# Altium PCB Wenzel_REF.PCBDOC (part 3 of 7)
Units mm, origin at the board's own origin, x right, y up, seen from the top; angles counter-clockwise.
Board outline 222.63 x 100.1 mm, 4 copper layers (Top, L2, L3, Bot), stack 1.6 mm thick; 406 components, 236 nets, 1324 pads, 1362 vias.
Unrouted connection lines stored in the file: 1.
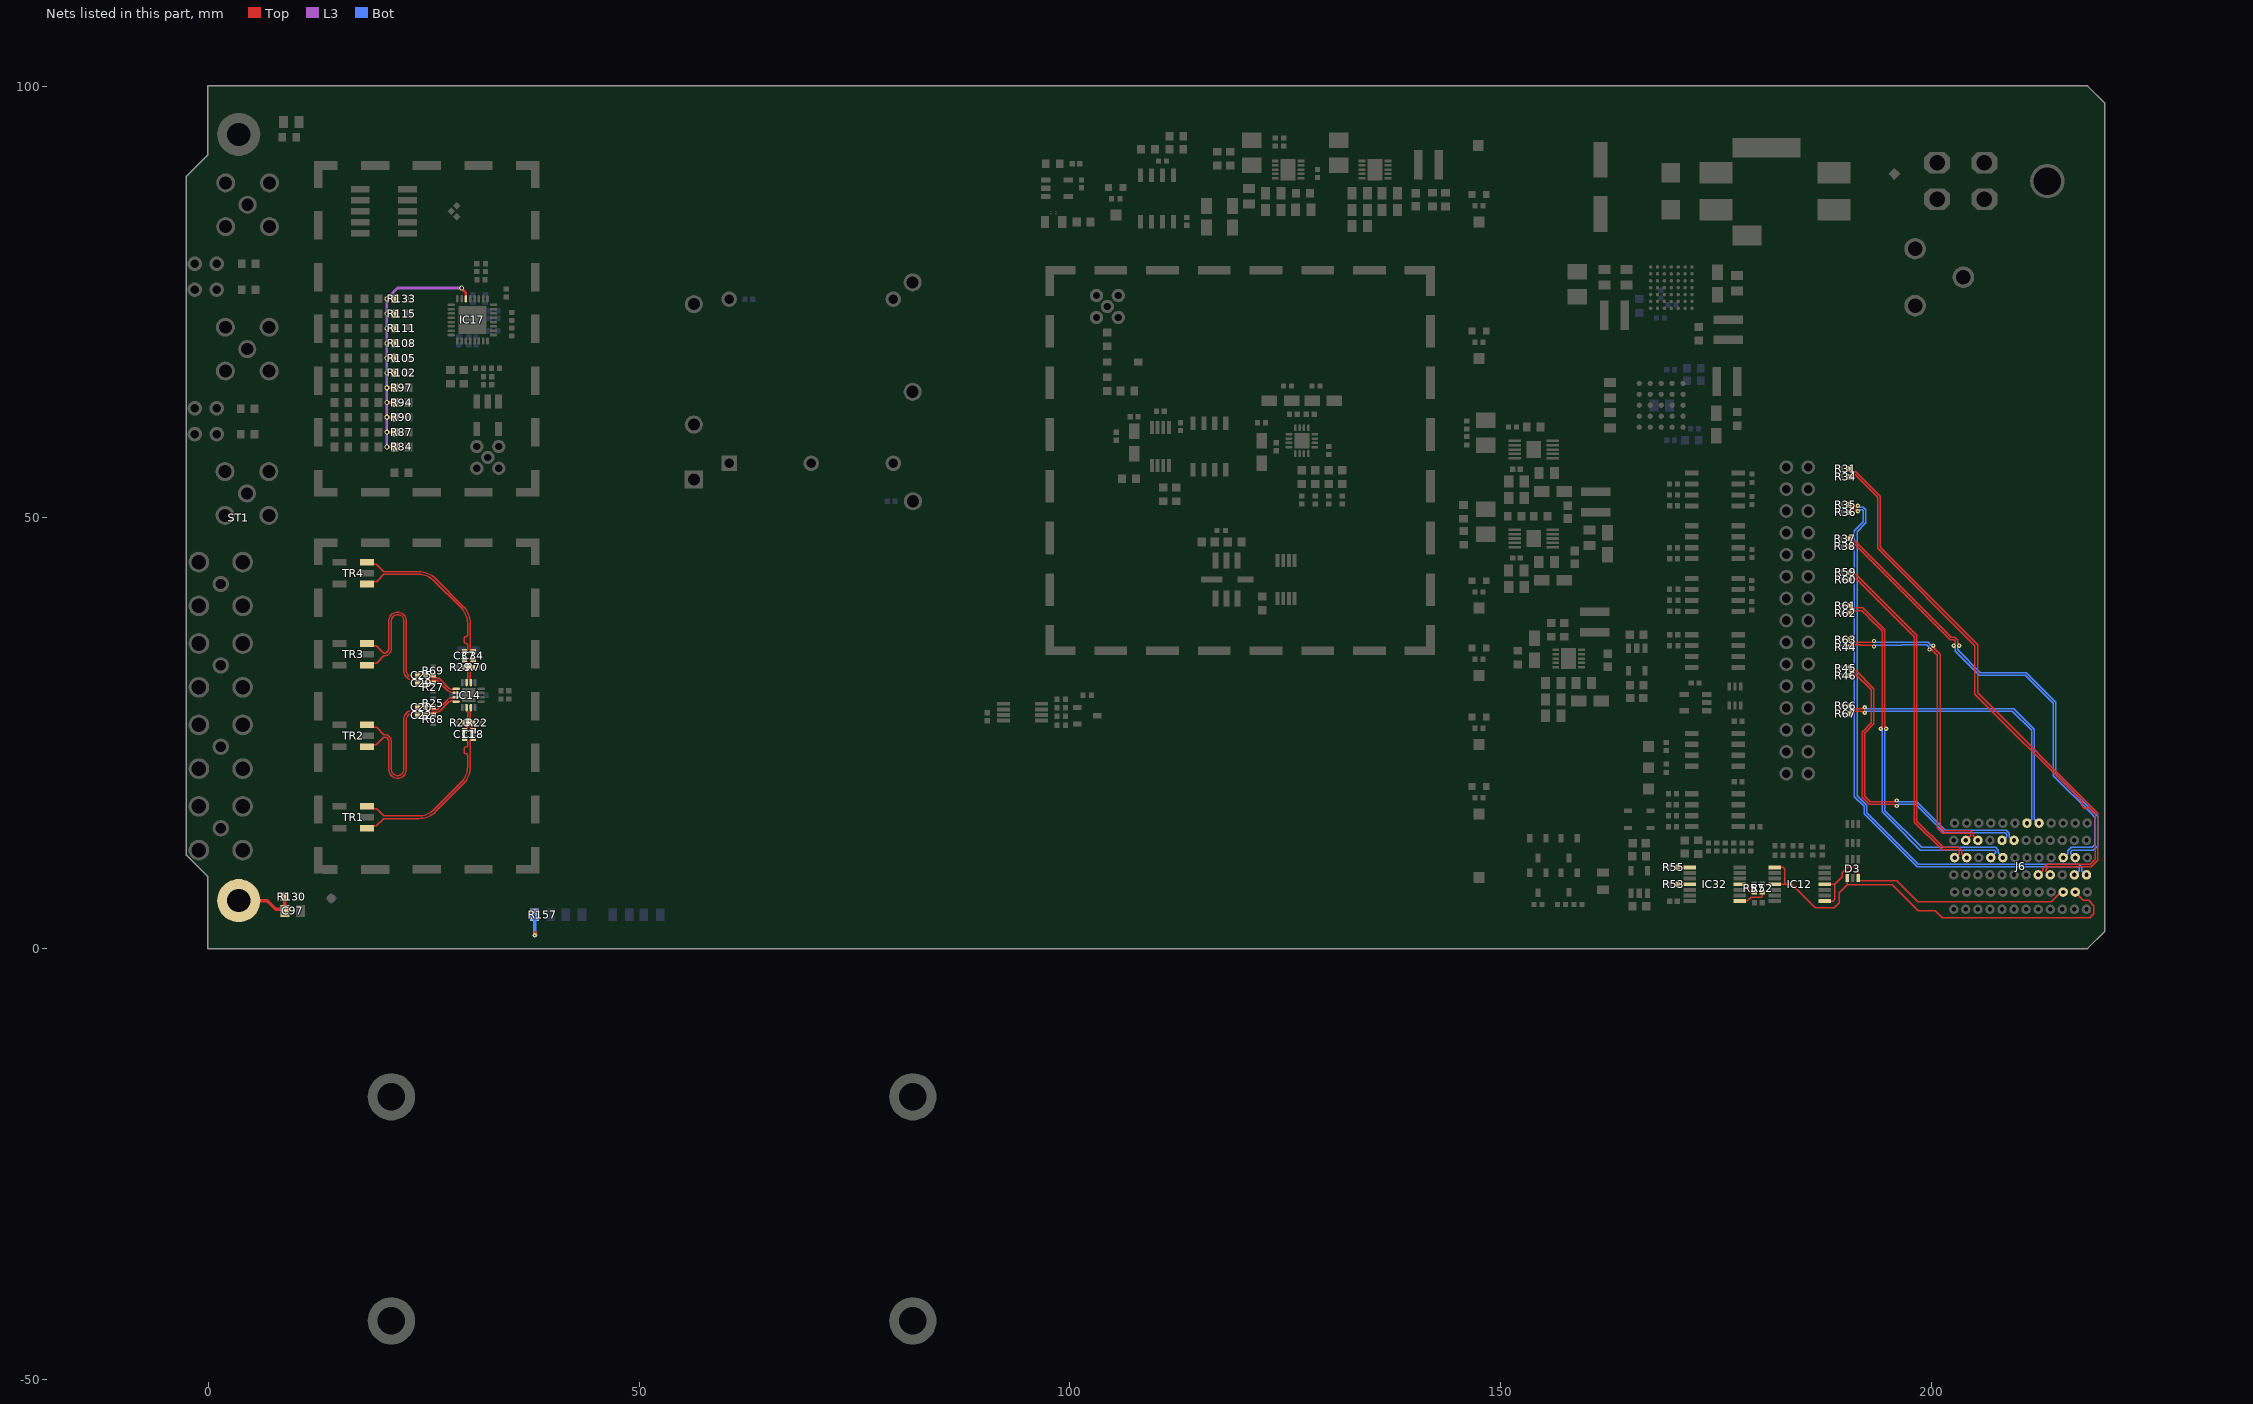
[diagram p4: the nets of this part, all layers, seen from the top]

## Part data (continued)
MSBOX2 MSBOX3: library part MSBOX_LAIRD_BMI-S-205-F, Manufacturer=LAIRD, Manufacturer Part Number=BMI-S-205-F, Author="CERN DEM JLC", Component Type=Standard, ComponentHeight=6mm, CreateDate=21.06.2017, HelpURL=\\cern.ch\dfs\Applications\Altium\Datasheets\MSBOX_LAIRD_BMI-S-205-F.pdf, LatestRevisionDate=21.06.2017, Mounted=Yes, PackageDescription="Frame of Standard Surface Mount Shield (Two Piece), External Dimensions 25.4 x 38.1mm", Part Description="Frame of Standard Surface Mount Shield (Two Piece), External Dimensions 25.4 x 38.1mm", Part Number=MSBOX_LAIRD_BMI-S-205-F, Pin Count=20, PressFit=No, Sense=No, SMD=Yes, Socket=No, Status=None
MSBOXC1: library part MSBOX_LAIRD_BMI-S-207-C, "Metal Screening Box - Top Cover 0 Pin", Manufacturer=LAIRD, Manufacturer Part Number=BMI-S-207-C, Author="CERN DEM JLC", Component Type=Standard, ComponentHeight=2mm, CreateDate=04.07.2017, HelpURL=\\cern.ch\dfs\Applications\Altium\Datasheets\MSBOX_LAIRD_BMI-S-207-C.pdf, LatestRevisionDate=04.07.2017, Mounted=Yes, PackageDescription="Cover for Frame of Standard Surface Mount Shield (Two Piece), External Dimensions 44.83 x 44.83mm", Part Description="Cover for Frame of Standard Surface Mount Shield (Two Piece), External Dimensions 44.83 x 44.83mm", Part Number=MSBOX_LAIRD_BMI-S-207-C, Pin Count=0, PressFit=No, Sense=No, SMD=Yes, Socket=No, Status=None
MSBOXC2 MSBOXC3: library part MSBOX_LAIRD_BMI-S-205-C, "Metal Screening Box - Top Cover 0 Pin", Manufacturer=LAIRD, Manufacturer Part Number=BMI-S-205-C, Author="CERN DEM JLC", Component Type=Standard, ComponentHeight=2mm, CreateDate=21.06.2017, HelpURL=\\cern.ch\dfs\Applications\Altium\Datasheets\MSBOX_LAIRD_BMI-S-205-C.pdf, LatestRevisionDate=21.06.2017, Mounted=Yes, PackageDescription="Cover for Frame of Standard Surface Mount Shield (Two Piece), External Dimensions 25.86 x 38.56mm", Part Description="Cover for Frame of Standard Surface Mount Shield (Two Piece), External Dimensions 25.86 x 38.56mm", Part Number=MSBOX_LAIRD_BMI-S-205-C, Pin Count=0, PressFit=No, Sense=No, SMD=Yes, Socket=No, Status=None
OSC1: library part OSC_100MHZ_PLETRONICS_OLA5007-100.0M, "12V ±0.05ppm Oven Controlled Crystal Oscillator OCXO", Manufacturer=PLETRONICS, Manufacturer Part Number=OLA5007-100.0M, Author="CERN DEM HF", Bonding=No, Component Type=Standard, ComponentHeight=12.7mm, CreateDate=21.12.2023, HelpURL=\\cern.ch\dfs\Applications\Altium\Datasheets\OSC_PLETRONICS_OLA5.pdf, LatestRevisionDate=21.12.2023, Mounted=Yes, PackageDescription="Oscillator, 9.525mm Pitch; 5 Pin, 25.78mm L X 25.78mm W X 12.70mm H, OLA5 Series", Part Description="5V, Stability: ±50ppb, -40°C to +85°C, Ultra Low Phase Noise OCXO, OLA5 Series", Part Number=OSC_100MHZ_PLETRONICS_OLA5007-100.0M, Pin Count=5, PressFit=No, Sense=No, SMD=No, Socket=No
OSC2: library part OSC_WENZEL_501-27514-34, "Surface Mount Voltage Controlled Oscillator, VX-501 Series", Manufacturer=WENZEL, Manufacturer Part Number=501-27514-34, Part Number=OSC_100MHZ_WENZEL_501-27514-34, Author=GK, Bonding=No, Component Type=Standard, ComponentHeight=19.05mm, CreateDate=22.12.2023, HelpURL=\\cern.ch\dfs\Applications\Altium\Datasheets\OSC_WENZEL_501-27514.pdf, LatestRevisionDate=22.12.2023, Mounted=Yes, PackageDescription="Oscillator, 5 Pin, 50.8mm L X 50.8mm W X 19.05mm H, 501 Series", Part Description="12V, Stability: ±0.2ppb, 0°C to +50°C, Low Noise Crystal Oscillators OCXO, OLA5 Series", Pin Count=5, PressFit=No, Sense=No, SMD=No, Socket=No
R1 R4 R65: library part R0402_2K2_1%_0.0625W_100PPM, "Resistor - 1%", Case=0402, Manufacturer=GENERIC, Manufacturer1 ComponentHeight=0.4mm, Manufacturer1 Example="YAGEO PHYCOMP", Manufacturer1 Part Number=232270672202L, Power=0.0625W, Tolerance=±1%, Author="CERN DEM JLC", Component Type=Standard, CreateDate=03.12.2007, HelpURL=\\cern.ch\dfs\Applications\Altium\Datasheets\R0402_Phycomp_RC0402.pdf, LatestRevisionDate=17.10.2012, Manufacturer Part Number=R0402_2K2_1%_0.0625W_100PPM, Mounted=Yes, Part Description="General Purpose Thick Film Chip Resistor", Part Number=R0402_2K2_1%_0.0625W_100PPM, Pin Count=2, PressFit=No, Sense=No, SMD=Yes, Socket=No, Status="Not Recommended", TC=±100ppm/°C
R2 R148 R169: library part R0603_30R_1%_0.1W_100PPM, "Resistor - 1%", Case=0603, Manufacturer=GENERIC, Manufacturer1 ComponentHeight=0.55mm, Manufacturer1 Example="NIC COMPONENT", Manufacturer1 Part Number=NRC06F30R0TRF, Power=0.1W, Tolerance=±1%, Author="CERN DEM JLC", Component Type=Standard, CreateDate=03/12/2007, HelpURL=\\cern.ch\dfs\Applications\Altium\Datasheets\R0603_NIC_NRC.pdf, LatestRevisionDate=13/03/2008, Manufacturer Part Number=R0603_30R_1%_0.1W_100PPM, Mounted=Yes, Part Description="General Purpose Thick Film Chip Resistor", Part Number=R0603_30R_1%_0.1W_100PPM, Pin Count=2, PressFit=No, Sense=No, SMD=Yes, Socket=No, Status=Preferred, TC=±100ppm/°C
R3 R81 R82 R99 R159 R160: library part R0603_10K_1%_0.1W_100PPM, "Resistor - 1%", Case=0603, Manufacturer=GENERIC, Manufacturer1 ComponentHeight=0.55mm, Manufacturer1 Example="NIC COMPONENT", Manufacturer1 Part Number=NRC06F1002TRF, Power=0.1W, Tolerance=±1%, Author="CERN DEM JLC", Component Type=Standard, CreateDate=03.12.2007, HelpURL=\\cern.ch\dfs\Applications\Altium\Datasheets\R0603_NIC_NRC.pdf, LatestRevisionDate=13.03.2008, Manufacturer Part Number=R0603_10K_1%_0.1W_100PPM, Mounted=Yes, Part Description="General Purpose Thick Film Chip Resistor", Part Number=R0603_10K_1%_0.1W_100PPM, Pin Count=2, PressFit=No, Sense=No, SMD=Yes, Socket=No, Status=Preferred, TC=±100ppm/°C
R5 R6: library part R0402_3K9_1%_0.0625W_100PPM, "Resistor - 1%", Case=0402, Manufacturer=GENERIC, Manufacturer1 ComponentHeight=0.4mm, Manufacturer1 Example="YAGEO PHYCOMP", Manufacturer1 Part Number=232270673902L, Power=0.0625W, Tolerance=±1%, Author="CERN DEM JLC", Component Type=Standard, CreateDate=03.12.2007, HelpURL=\\cern.ch\dfs\Applications\Altium\Datasheets\R0402_Phycomp_RC0402.pdf, LatestRevisionDate=17.10.2012, Manufacturer Part Number=R0402_3K9_1%_0.0625W_100PPM, Mounted=Yes, Part Description="General Purpose Thick Film Chip Resistor", Part Number=R0402_3K9_1%_0.0625W_100PPM, Pin Count=2, PressFit=No, Sense=No, SMD=Yes, Socket=No, Status="Not Recommended", TC=±100ppm/°C
R7 R19 R30 R49 R56 R58 R122 R123 R124 R125 R131 R137 R139 R146 R152 R153: library part R0402_10K_1%_0.0625W_100PPM, "Resistor - 1%", Case=0402, Manufacturer=GENERIC, Manufacturer1 ComponentHeight=0.4mm, Manufacturer1 Example="YAGEO PHYCOMP", Manufacturer1 Part Number=232270671003L, Power=0.0625W, Tolerance=±1%, Author="CERN DEM JLC", Component Type=Standard, HelpURL=\\cern.ch\dfs\Applications\Altium\Datasheets\R0402_Phycomp_RC0402.pdf, Manufacturer Part Number=R0402_10K_1%_0.0625W_100PPM, Mounted=Yes, Part Description="General Purpose Thick Film Chip Resistor", Part Number=R0402_10K_1%_0.0625W_100PPM, Pin Count=2, PressFit=No, Sense=No, SMD=Yes, Socket=No, Status="Not Recommended", TC=±100ppm/°C
  R7 R19 R30 R49 R56 R122 R123 R124 R125 R131 R152 R153: CreateDate=03.12.2007, LatestRevisionDate=17.10.2012
  R58 R137 R139 R146: CreateDate=2007-12-03, LatestRevisionDate=2012-10-17
R8: library part R0603_120K_1%_0.1W_100PPM, "Resistor - 1%", Case=0603, Manufacturer=GENERIC, Manufacturer1 ComponentHeight=0.55mm, Manufacturer1 Example="NIC COMPONENT", Manufacturer1 Part Number=NRC06F1203TRF, Power=0.1W, Tolerance=±1%, Author="CERN DEM JLC", Component Type=Standard, CreateDate=03.12.2007, HelpURL=\\cern.ch\dfs\Applications\Altium\Datasheets\R0603_NIC_NRC.pdf, LatestRevisionDate=13.03.2008, Manufacturer Part Number=R0603_120K_1%_0.1W_100PPM, Mounted=Yes, Part Description="General Purpose Thick Film Chip Resistor", Part Number=R0603_120K_1%_0.1W_100PPM, Pin Count=2, PressFit=No, Sense=No, SMD=Yes, Socket=No, Status=Preferred, TC=±100ppm/°C
R9: library part R0603_12K_1%_0.1W_100PPM, "Resistor - 1%", Case=0603, Manufacturer=GENERIC, Manufacturer1 ComponentHeight=0.55mm, Manufacturer1 Example="NIC COMPONENT", Manufacturer1 Part Number=NRC06F1202TRF, Power=0.1W, Tolerance=±1%, Author="CERN DEM JLC", Component Type=Standard, CreateDate=03.12.2007, HelpURL=\\cern.ch\dfs\Applications\Altium\Datasheets\R0603_NIC_NRC.pdf, LatestRevisionDate=13.03.2008, Manufacturer Part Number=R0603_12K_1%_0.1W_100PPM, Mounted=Yes, Part Description="General Purpose Thick Film Chip Resistor", Part Number=R0603_12K_1%_0.1W_100PPM, Pin Count=2, PressFit=No, Sense=No, SMD=Yes, Socket=No, Status=Preferred, TC=±100ppm/°C
R10 R12 R13 R14 R15 R16 R18 R64 R158 R161 R162 R163 R165 R166 R170: library part R0402_100R_1%_0.0625W_100PPM, "Resistor - 1%", Case=0402, Manufacturer=GENERIC, Manufacturer1 ComponentHeight=0.4mm, Manufacturer1 Example="YAGEO PHYCOMP", Manufacturer1 Part Number=232270671001L, Power=0.0625W, Tolerance=±1%, Author="CERN DEM JLC", Component Type=Standard, CreateDate=03.12.2007, HelpURL=\\cern.ch\dfs\Applications\Altium\Datasheets\R0402_Phycomp_RC0402.pdf, LatestRevisionDate=17.10.2012, Manufacturer Part Number=R0402_100R_1%_0.0625W_100PPM, Mounted=Yes, Part Description="General Purpose Thick Film Chip Resistor", Part Number=R0402_100R_1%_0.0625W_100PPM, Pin Count=2, PressFit=No, Sense=No, SMD=Yes, Socket=No, Status="Not Recommended", TC=±100ppm/°C
R11: library part R0402_39K_1%_0.0625W_100PPM, "Resistor - 1%", Case=0402, Manufacturer=GENERIC, Manufacturer1 ComponentHeight=0.4mm, Manufacturer1 Example="YAGEO PHYCOMP", Manufacturer1 Part Number=232270673903, Power=0.0625W, Tolerance=±1%, Author="CERN DEM JLC", Component Type=Standard, CreateDate=03.12.2007, HelpURL=\\cern.ch\dfs\Applications\Altium\Datasheets\R0402_Phycomp_RC0402.pdf, LatestRevisionDate=17.10.2012, Manufacturer Part Number=R0402_39K_1%_0.0625W_100PPM, Mounted=Yes, Part Description="General Purpose Thick Film Chip Resistor", Part Number=R0402_39K_1%_0.0625W_100PPM, Pin Count=2, PressFit=No, Sense=No, SMD=Yes, Socket=No, Status="Not Recommended", TC=±100ppm/°C
R17: library part R0402_1K_1%_0.0625W_100PPM, "Resistor - 1%", Case=0402, Manufacturer=GENERIC, Manufacturer1 ComponentHeight=0.4mm, Manufacturer1 Example="YAGEO PHYCOMP", Manufacturer1 Part Number=232270671002L, Power=0.0625W, Tolerance=±1%, Author="CERN DEM JLC", Component Type=Standard, CreateDate=2007-12-03, HelpURL=\\cern.ch\dfs\Applications\Altium\Datasheets\R0402_Phycomp_RC0402.pdf, LatestRevisionDate=2012-10-17, Manufacturer Part Number=R0402_1K_1%_0.0625W_100PPM, Mounted=Yes, Part Description="General Purpose Thick Film Chip Resistor", Part Number=R0402_1K_1%_0.0625W_100PPM, Pin Count=2, Sense=No, SMD=Yes, Socket=No, Status="Not recommended", TC=±100ppm/°C
R20: library part R0603_6K2_1%_0.1W_100PPM, "Resistor - 1%", Case=0603, Manufacturer=GENERIC, Manufacturer1 ComponentHeight=0.55mm, Manufacturer1 Example="NIC COMPONENT", Manufacturer1 Part Number=NRC06F6201TRF, Power=0.1W, Tolerance=±1%, Author="CERN DEM JLC", Component Type=Standard, CreateDate=03.12.2007, HelpURL=\\cern.ch\dfs\Applications\Altium\Datasheets\R0603_NIC_NRC.pdf, LatestRevisionDate=13.03.2008, Manufacturer Part Number=R0603_6K2_1%_0.1W_100PPM, Mounted=Yes, Part Description="General Purpose Thick Film Chip Resistor", Part Number=R0603_6K2_1%_0.1W_100PPM, Pin Count=2, PressFit=No, Sense=No, SMD=Yes, Socket=No, Status=Preferred, TC=±100ppm/°C
R21: library part R0402_82R_1%_0.0625W_100PPM, "Resistor - 1%", Case=0402, Manufacturer=GENERIC, Manufacturer1 ComponentHeight=0.4mm, Manufacturer1 Example="YAGEO PHYCOMP", Manufacturer1 Part Number=232270678209L, Power=0.0625W, Tolerance=±1%, Author="CERN DEM JLC", Component Type=Standard, CreateDate=03.12.2007, HelpURL=\\cern.ch\dfs\Applications\Altium\Datasheets\R0402_Phycomp_RC0402.pdf, LatestRevisionDate=17.10.2012, Manufacturer Part Number=R0402_82R_1%_0.0625W_100PPM, Mounted=Yes, Part Description="General Purpose Thick Film Chip Resistor", Part Number=R0402_82R_1%_0.0625W_100PPM, Pin Count=2, PressFit=No, Sense=No, SMD=Yes, Socket=No, Status="Not Recommended", TC=±100ppm/°C
R22 R23 R25 R27 R29 R68 R69 R70: library part R0402_120R_1%_0.0625W_100PPM, "Resistor - 1%", Case=0402, Manufacturer=GENERIC, Manufacturer1 ComponentHeight=0.4mm, Manufacturer1 Example="YAGEO PHYCOMP", Manufacturer1 Part Number=232270671201L, Power=0.0625W, Tolerance=±1%, Author="CERN DEM JLC", Component Type=Standard, CreateDate=03.12.2007, HelpURL=\\cern.ch\dfs\Applications\Altium\Datasheets\R0402_Phycomp_RC0402.pdf, LatestRevisionDate=17.10.2012, Manufacturer Part Number=R0402_120R_1%_0.0625W_100PPM, Mounted=Yes, Part Description="General Purpose Thick Film Chip Resistor", Part Number=R0402_120R_1%_0.0625W_100PPM, Pin Count=2, PressFit=No, Sense=No, SMD=Yes, Socket=No, Status="Not Recommended", TC=±100ppm/°C
R24 R28: library part R1206_0R02_1%_0.5W_100PPM, "Resistor - 1%", Case=1206, Manufacturer="TT Electronics", Manufacturer Part Number=LRF1206-R020FI, Power=0.5W, Tolerance=±1%, Author="CERN DEM JLC", Component Type=Standard, ComponentHeight=0.8mm, CreateDate=11.05.2010, HelpURL=\\cern.ch\dfs\Applications\Altium\Datasheets\R1206_WELWYN_LRF.pdf, LatestRevisionDate=03.09.2012, Mounted=Yes, Part Description="Low Value Flat Chip Resistor", Part Number=R1206_0R02_1%_0.5W_100PPM, Pin Count=2, PressFit=No, Sense=No, SMD=Yes, Socket=No, Status=None, TC=±100ppm/°C
R26: library part R0603_1K2_1%_0.1W_100PPM, "Resistor - 1%", Case=0603, Manufacturer=GENERIC, Manufacturer1 ComponentHeight=0.55mm, Manufacturer1 Example="NIC COMPONENT", Manufacturer1 Part Number=NRC06F1201TRF, Power=0.1W, Tolerance=±1%, Author="CERN DEM JLC", Component Type=Standard, CreateDate=03.12.2007, HelpURL=\\cern.ch\dfs\Applications\Altium\Datasheets\R0603_NIC_NRC.pdf, LatestRevisionDate=13.03.2008, Manufacturer Part Number=R0603_1K2_1%_0.1W_100PPM, Mounted=Yes, Part Description="General Purpose Thick Film Chip Resistor", Part Number=R0603_1K2_1%_0.1W_100PPM, Pin Count=2, PressFit=No, Sense=No, SMD=Yes, Socket=No, Status=Preferred, TC=±100ppm/°C
R31 R34 R35 R36 R37 R38 R44 R45 R46 R59 R60 R61 R62 R63 R66 R67 R126 R127 R128 R136 R144 R145 R150 R151 R179: library part R0402_0R_JUMPER, "Resistor", Case=0402, Manufacturer=GENERIC, Manufacturer1 ComponentHeight=0.4mm, Manufacturer1 Example="YAGEO PHYCOMP", Manufacturer1 Part Number=232270591001L, Author="CERN DEM JLC", Component Type=Standard, CreateDate=03.12.2007, HelpURL=\\cern.ch\dfs\Applications\Altium\Datasheets\R0402_Phycomp_RC0402.pdf, LatestRevisionDate=17.10.2012, Manufacturer Part Number=R0402_0R_JUMPER, Mounted=Yes, Part Description="1A (0.05R Max DC Resistance) Zero Ohm Jumper", Part Number=R0402_0R_JUMPER, Pin Count=2, Sense=No, SMD=Yes, Socket=No
  R31 R34 R35 R36 R37 R38 R44 R45 R46 R59 R60 R61 R62 R63 R66 R67 R136 R150 R151: PressFit=No, Status="Not Recommended"
  R126 R127 R128 R144 R145 R179: Status="Not recommended"
R32 R42: library part R0603_1K6_1%_0.1W_100PPM, "Resistor - 1%", Case=0603, Manufacturer=GENERIC, Manufacturer1 ComponentHeight=0.55mm, Manufacturer1 Example="NIC COMPONENT", Manufacturer1 Part Number=NRC06F1601TRF, Power=0.1W, Tolerance=±1%, Author="CERN DEM JLC", Component Type=Standard, CreateDate=03.12.2007, HelpURL=\\cern.ch\dfs\Applications\Altium\Datasheets\R0603_NIC_NRC.pdf, LatestRevisionDate=13.03.2008, Manufacturer Part Number=R0603_1K6_1%_0.1W_100PPM, Mounted=Yes, Part Description="General Purpose Thick Film Chip Resistor", Part Number=R0603_1K6_1%_0.1W_100PPM, Pin Count=2, PressFit=No, Sense=No, SMD=Yes, Socket=No, Status=Preferred, TC=±100ppm/°C
R33: library part R0603_15K_1%_0.1W_100PPM, "Resistor - 1%", Case=0603, Manufacturer=GENERIC, Manufacturer1 ComponentHeight=0.55mm, Manufacturer1 Example="NIC COMPONENT", Manufacturer1 Part Number=NRC06F1502TRF, Power=0.1W, Tolerance=±1%, Author="CERN DEM JMW", Component Type=Standard, CreateDate=17.08.2015, HelpURL=\\cern.ch\dfs\Applications\Altium\Datasheets\R0603_NIC_NRC.pdf, LatestRevisionDate=17.08.2015, Manufacturer Part Number=R0603_15K_1%_0.1W_100PPM, Mounted=Yes, Part Description="General Purpose Thick Film Chip Resistor", Part Number=R0603_15K_1%_0.1W_100PPM, Pin Count=2, PressFit=No, Sense=No, SMD=Yes, Socket=No, Status=Preferred, TC=±100ppm/°C
R39: library part R0603_33k_1%_0.1W_100PPM, "Resistor - 1%", Case=0603, Manufacturer=GENERIC, Manufacturer1 ComponentHeight=0.55mm, Manufacturer1 Example="NIC COMPONENT", Manufacturer1 Part Number=NRC06F3302TRF, Manufacturer Part Number=R0603_33K_1%_0.1W_100PPM, Power=0.1W, Tolerance=±1%, Author="CERN DEM JLC", Component Type=Standard, CreateDate=03.12.2007, HelpURL=\\cern.ch\dfs\Applications\Altium\Datasheets\R0603_NIC_NRC.pdf, LatestRevisionDate=13.03.2008, Mounted=Yes, Part Description="General Purpose Thick Film Chip Resistor", Part Number=R0603_33K_1%_0.1W_100PPM, Pin Count=2, PressFit=No, Sense=No, SMD=Yes, Socket=No, Status=Preferred, TC=±100ppm/°C
R40: library part R0603_100K_1%_0.1W_100PPM, "Resistor - 1%", Case=0603, Manufacturer=GENERIC, Manufacturer1 ComponentHeight=0.55mm, Manufacturer1 Example="NIC COMPONENT", Manufacturer1 Part Number=NRC06F1003TRF, Power=0.1W, Tolerance=±1%, Author="CERN DEM JLC", Component Type=Standard, CreateDate=03.12.2007, HelpURL=\\cern.ch\dfs\Applications\Altium\Datasheets\R0603_NIC_NRC.pdf, LatestRevisionDate=13.03.2008, Manufacturer Part Number=R0603_100K_1%_0.1W_100PPM, Mounted=Yes, Part Description="General Purpose Thick Film Chip Resistor", Part Number=R0603_100K_1%_0.1W_100PPM, Pin Count=2, PressFit=No, Sense=No, SMD=Yes, Socket=No, Status=Preferred, TC=±100ppm/°C
R41: library part R0603_5K1_1%_0.1W_100PPM, "Resistor - 1%", Case=0603, Manufacturer=GENERIC, Manufacturer1 ComponentHeight=0.55mm, Manufacturer1 Example="NIC COMPONENT", Manufacturer1 Part Number=NRC06F5101TRF, Power=0.1W, Tolerance=±1%, Author="CERN DEM JLC", Component Type=Standard, CreateDate=03.12.2007, HelpURL=\\cern.ch\dfs\Applications\Altium\Datasheets\R0603_NIC_NRC.pdf, LatestRevisionDate=13.03.2008, Manufacturer Part Number=R0603_5K1_1%_0.1W_100PPM, Mounted=Yes, Part Description="General Purpose Thick Film Chip Resistor", Part Number=R0603_5K1_1%_0.1W_100PPM, Pin Count=2, PressFit=No, Sense=No, SMD=Yes, Socket=No, Status=Preferred, TC=±100ppm/°C
R43: library part R0603_51K_1%_0.1W_100PPM, "Resistor - 1%", Case=0603, Manufacturer=GENERIC, Manufacturer1 ComponentHeight=0.55mm, Manufacturer1 Example="NIC COMPONENT", Manufacturer1 Part Number=NRC06F5102TRF, Power=0.1W, Tolerance=±1%, Author="CERN DEM JLC", Component Type=Standard, CreateDate=03.12.2007, HelpURL=\\cern.ch\dfs\Applications\Altium\Datasheets\R0603_NIC_NRC.pdf, LatestRevisionDate=13.03.2008, Manufacturer Part Number=R0603_51K_1%_0.1W_100PPM, Mounted=Yes, Part Description="General Purpose Thick Film Chip Resistor", Part Number=R0603_51K_1%_0.1W_100PPM, Pin Count=2, PressFit=No, Sense=No, SMD=Yes, Socket=No, Status=Preferred, TC=±100ppm/°C
R47: library part R0402_1k5_1%_0.0625W_100PPM, "Resistor - 1%", Case=0402, Manufacturer=GENERIC, Manufacturer1 ComponentHeight=0.4mm, Manufacturer1 Example="YAGEO PHYCOMP", Manufacturer1 Part Number=232270671502L, Manufacturer Part Number=R0402_1K5_1%_0.0625W_100PPM, Power=0.0625W, Tolerance=±1%, Author="CERN DEM JLC", Component Type=Standard, CreateDate=03.12.2007, HelpURL=\\cern.ch\dfs\Applications\Altium\Datasheets\R0402_Phycomp_RC0402.pdf, LatestRevisionDate=17.10.2012, Mounted=Yes, Part Description="General Purpose Thick Film Chip Resistor", Part Number=R0402_1K5_1%_0.0625W_100PPM, Pin Count=2, PressFit=No, Sense=No, SMD=Yes, Socket=No, Status="Not Recommended", TC=±100ppm/°C
R48: library part R0402_22K_1%_0.0625W_100PPM, "Resistor - 1%", Case=0402, Manufacturer=GENERIC, Manufacturer1 ComponentHeight=0.4mm, Manufacturer1 Example="YAGEO PHYCOMP", Manufacturer1 Part Number=232270672203L, Power=0.0625W, Tolerance=±1%, Author="CERN DEM JLC", Component Type=Standard, CreateDate=03.12.2007, HelpURL=\\cern.ch\dfs\Applications\Altium\Datasheets\R0402_Phycomp_RC0402.pdf, LatestRevisionDate=17.10.2012, Manufacturer Part Number=R0402_22K_1%_0.0625W_100PPM, Mounted=Yes, Part Description="General Purpose Thick Film Chip Resistor", Part Number=R0402_22K_1%_0.0625W_100PPM, Pin Count=2, PressFit=No, Sense=No, SMD=Yes, Socket=No, Status="Not Recommended", TC=±100ppm/°C
R50 R73 R74 R79 R80: library part R0402_200R_1%_0.0625W_100PPM, "Resistor - 1%", Case=0402, Manufacturer=GENERIC, Manufacturer1 ComponentHeight=0.4mm, Manufacturer1 Example="YAGEO PHYCOMP", Manufacturer1 Part Number=232270672001L, Power=0.0625W, Tolerance=±1%, Author="CERN DEM JLC", Component Type=Standard, HelpURL=\\cern.ch\dfs\Applications\Altium\Datasheets\R0402_Phycomp_RC0402.pdf, Manufacturer Part Number=R0402_200R_1%_0.0625W_100PPM, Mounted=Yes, Part Description="General Purpose Thick Film Chip Resistor", Part Number=R0402_200R_1%_0.0625W_100PPM, Pin Count=2, PressFit=No, Sense=No, SMD=Yes, Socket=No, Status="Not Recommended", TC=±100ppm/°C
  R50: CreateDate=2007-12-03, LatestRevisionDate=2012-10-17
  R73 R74 R79 R80: CreateDate=03.12.2007, LatestRevisionDate=17.10.2012
R51 R116: library part R0603_49K9_0.1%_0.063W_10PPM, "Resistor - 0.1%", Case=0603, Manufacturer=GENERIC, Manufacturer1 ComponentHeight=0.5mm, Manufacturer1 Example="TYCO HOLSWORTHY", Manufacturer1 Part Number=RN73C1J49K9BTDF, Power=0.063W, Tolerance=±0.1%, Author="CERN DEM JLC", Component Type=Standard, CreateDate=03.12.2007, HelpURL=\\cern.ch\dfs\Applications\Altium\Datasheets\R0603_Tyco_RN73.pdf, LatestRevisionDate=13.03.2008, Manufacturer Part Number=R0603_49K9_0.1%_0.063W_10PPM, Mounted=Yes, Part Description="Thin Film Chip Resistor", Part Number=R0603_49K9_0.1%_0.063W_10PPM, Pin Count=2, PressFit=No, Sense=No, SMD=Yes, Socket=No, Status="Not Recommended", TC=±10ppm
R52 R53 R54 R55 R57 R140: library part R0402_22R_1%_0.0625W_100PPM, "Resistor - 1%", Case=0402, Manufacturer=GENERIC, Manufacturer1 ComponentHeight=0.4mm, Manufacturer1 Example="YAGEO PHYCOMP", Manufacturer1 Part Number=232270672209L, Power=0.0625W, Tolerance=±1%, Author="CERN DEM JLC", Component Type=Standard, CreateDate=03.12.2007, HelpURL=\\cern.ch\dfs\Applications\Altium\Datasheets\R0402_Phycomp_RC0402.pdf, LatestRevisionDate=17.10.2012, Manufacturer Part Number=R0402_22R_1%_0.0625W_100PPM, Mounted=Yes, Part Description="General Purpose Thick Film Chip Resistor", Part Number=R0402_22R_1%_0.0625W_100PPM, Pin Count=2, PressFit=No, Sense=No, SMD=Yes, Socket=No, Status="Not Recommended"
  R52 R53 R54 R55 R57: TC=±100ppm/°C
R71: library part R0805_0R05_1%_0.25W_300PPM, "Resistor - 1%", Case=0805, Manufacturer=GENERIC, Manufacturer1 ComponentHeight=0.60mm, Manufacturer1 Example="YAGEO PHYCOMP", Manufacturer1 Part Number="235051117500L or RL0805FR-7W0R05L", Power=0.25W, Tolerance=±1%, Author="CERN DEM MR", Component Type=Standard, CreateDate=31.03.2016, HelpURL=\\cern.ch\dfs\Applications\Altium\Datasheets\R0805_Phycomp_RL0805.pdf, LatestRevisionDate=31.03.2016, Manufacturer Part Number=R0805_0R05_1%_0.25W_300PPM, Mounted=Yes, Part Description="Low Resistance Thick Film Chip Resistor", Part Number=R0805_0R05_1%_0.25W_300PPM, Pin Count=2, PressFit=No, Sense=No, SMD=Yes, Socket=No, Status="Not Recommended", TC=±300ppm/°C
R72 R76 R78 R83 R84 R86 R87 R89 R90 R91 R94 R95 R97 R98 R102 R103 R104 R106 R108 R109 R110 R112 R115 R120 R132 R134 R167 R168: library part R0603_NO-VALUE, "Resistor", Case=0603, Author="CERN DEM JLC", Component Type=Standard, CreateDate=03.12.2007, HelpURL=Undefined, LatestRevisionDate=13.03.2008, Manufacturer=Undefined, Manufacturer1 ComponentHeight=Undefined, Manufacturer1 Example=Undefined, Manufacturer1 Part Number=Undefined, Manufacturer Part Number=R0603_NO-VALUE, Mounted=No, Part Description="Reserved Footprint For a 0603 (1608) Chip Resistor", Part Number=R0603_NO-VALUE, Pin Count=2, PressFit=No, Sense=No, SMD=Yes, Socket=No, Status=None
R75: library part R0402_49R9_1%_0.0625W_100PPM, "Resistor - 1%", Case=0402, Manufacturer=GENERIC, Manufacturer1 ComponentHeight=0.4mm, Manufacturer1 Example="YAGEO PHYCOMP", Manufacturer1 Part Number="232270674999L or RC0402FR-0749R9L", Power=0.0625W, Tolerance=±1%, Author="CERN DEM JLC", Component Type=Standard, CreateDate=24.10.2012, HelpURL=\\cern.ch\dfs\Applications\Altium\Datasheets\R0402_Phycomp_RC0402.pdf, LatestRevisionDate=24.10.2012, Manufacturer Part Number=R0402_49R9_1%_0.0625W_100PPM, Mounted=Yes, Part Description="General Purpose Thick Film Chip Resistor", Part Number=R0402_49R9_1%_0.0625W_100PPM, Pin Count=2, PressFit=No, Sense=No, SMD=Yes, Socket=No, Status="Not Recommended", TC=±100ppm/°C
R77: library part R0402_4K12_1%_0.0625W_100PPM, "Resistor - 1%", Case=0402, Manufacturer=GENERIC, Manufacturer1 ComponentHeight=0.4mm, Manufacturer1 Example="YAGEO PHYCOMP", Manufacturer1 Part Number="232270674122L or RC0402FR-074K12L", Power=0.0625W, Tolerance=±1%, Author="CERN DEM JLC", Component Type=Standard, CreateDate=24.10.2012, HelpURL=\\cern.ch\dfs\Applications\Altium\Datasheets\R0402_Phycomp_RC0402.pdf, LatestRevisionDate=24.10.2012, Manufacturer Part Number=R0402_4K12_1%_0.0625W_100PPM, Mounted=Yes, Part Description="General Purpose Thick Film Chip Resistor", Part Number=R0402_4K12_1%_0.0625W_100PPM, Pin Count=2, PressFit=No, Sense=No, SMD=Yes, Socket=No, Status="Not Recommended", TC=±100ppm/°C
R85 R88 R93 R96 R101 R105 R107 R111 R114 R129 R130 R133: library part R0603_0R_JUMPER, "Resistor", Case=0603, Manufacturer=GENERIC, Manufacturer1 ComponentHeight=0.55mm, Manufacturer1 Example="NIC COMPONENT", Manufacturer1 Part Number=NRC06Z0, Author="CERN DEM JLC", Component Type=Standard, CreateDate=03.12.2007, HelpURL=\\cern.ch\dfs\Applications\Altium\Datasheets\R0603_NIC_NRC.pdf, LatestRevisionDate=13.03.2008, Manufacturer Part Number=R0603_0R_JUMPER, Mounted=Yes, Part Description="1A (0.05R Max DC Resistance) Zero Ohm Jumper", Part Number=R0603_0R_JUMPER, Pin Count=2, PressFit=No, Sense=No, SMD=Yes, Socket=No, Status=Preferred
R92 R118 R119 R121: library part R0603_220R_1%_0.1W_100PPM, "Resistor - 1%", Case=0603, Manufacturer=GENERIC, Manufacturer1 ComponentHeight=0.55mm, Manufacturer1 Example="NIC COMPONENT", Manufacturer1 Part Number=NRC06F2200TRF, Power=0.1W, Tolerance=±1%, Author="CERN DEM JLC", Component Type=Standard, CreateDate=03.12.2007, HelpURL=\\cern.ch\dfs\Applications\Altium\Datasheets\R0603_NIC_NRC.pdf, LatestRevisionDate=13.03.2008, Manufacturer Part Number=R0603_220R_1%_0.1W_100PPM, Mounted=Yes, Part Description="General Purpose Thick Film Chip Resistor", Part Number=R0603_220R_1%_0.1W_100PPM, Pin Count=2, Sense=No, SMD=Yes, Socket=No, Status=Preferred, TC=±100ppm/°C
R100: library part R0603_3K3_1%_0.1W_100PPM, "Resistor - 1%", Case=0603, Manufacturer=GENERIC, Manufacturer1 ComponentHeight=0.55mm, Manufacturer1 Example="NIC COMPONENT", Manufacturer1 Part Number=NRC06F3301TRF, Power=0.1W, Tolerance=±1%, Author="CERN DEM JLC", Component Type=Standard, CreateDate=03.12.2007, HelpURL=\\cern.ch\dfs\Applications\Altium\Datasheets\R0603_NIC_NRC.pdf, LatestRevisionDate=13.03.2008, Manufacturer Part Number=R0603_3K3_1%_0.1W_100PPM, Mounted=Yes, Part Description="General Purpose Thick Film Chip Resistor", Part Number=R0603_3K3_1%_0.1W_100PPM, Pin Count=2, PressFit=No, Sense=No, SMD=Yes, Socket=No, Status=Preferred, TC=±100ppm/°C
R113: library part R0402_220K_1%_0.0625W_100PPM, "Resistor - 1%", Case=0402, Manufacturer=GENERIC, Manufacturer1 ComponentHeight=0.4mm, Manufacturer1 Example="YAGEO PHYCOMP", Manufacturer1 Part Number=232270672204L, Power=0.0625W, Tolerance=±1%, Author="CERN DEM JLC", Component Type=Standard, CreateDate=03.12.2007, HelpURL=\\cern.ch\dfs\Applications\Altium\Datasheets\R0402_Phycomp_RC0402.pdf, LatestRevisionDate=17.10.2012, Manufacturer Part Number=R0402_220K_1%_0.0625W_100PPM, Mounted=Yes, Part Description="General Purpose Thick Film Chip Resistor", Part Number=R0402_220K_1%_0.0625W_100PPM, Pin Count=2, PressFit=No, Sense=No, SMD=Yes, Socket=No, Status="Not Recommended", TC=±100ppm/°C
R117 R142: library part R0402_27K_1%_0.0625W_100PPM, "Resistor - 1%", Case=0402, Manufacturer=GENERIC, Manufacturer1 ComponentHeight=0.4mm, Manufacturer1 Example="YAGEO PHYCOMP", Manufacturer1 Part Number=232270672703L, Power=0.0625W, Tolerance=±1%, Author="CERN DEM JLC", Component Type=Standard, CreateDate=03/12/2007, HelpURL=\\cern.ch\dfs\Applications\Altium\Datasheets\R0402_Phycomp_RC0402.pdf, LatestRevisionDate=17/10/2012, Manufacturer Part Number=R0402_27K_1%_0.0625W_100PPM, Mounted=Yes, Part Description="General Purpose Thick Film Chip Resistor", Part Number=R0402_27K_1%_0.0625W_100PPM, Pin Count=2, PressFit=No, Sense=No, SMD=Yes, Socket=No, Status="Not Recommended", TC=±100ppm/°C
R135: library part R0402_47K_1%_0.0625W_100PPM, "Resistor - 1%", Case=0402, Manufacturer=GENERIC, Manufacturer1 ComponentHeight=0.4mm, Manufacturer1 Example="YAGEO PHYCOMP", Manufacturer1 Part Number=232270675103L, Power=0.0625W, Tolerance=±1%, Author="CERN DEM JLC", Component Type=Standard, CreateDate=03/12/2007, HelpURL=\\cern.ch\dfs\Applications\Altium\Datasheets\R0402_Phycomp_RC0402.pdf, LatestRevisionDate=17/10/2012, Manufacturer Part Number=R0402_47K_1%_0.0625W_100PPM, Mounted=Yes, Part Description="General Purpose Thick Film Chip Resistor", Part Number=R0402_47K_1%_0.0625W_100PPM, Pin Count=2, PressFit=No, Sense=No, SMD=Yes, Socket=No, Status="Not Recommended", TC=±100ppm/°C
R138: library part R0603_2K7_1%_0.1W_100PPM, "Resistor - 1%", Case=0603, Manufacturer=GENERIC, Manufacturer1 ComponentHeight=0.55mm, Manufacturer1 Example="YAGEO PHYCOMP", Manufacturer1 Part Number=RC0603FR-072K7L, Power=0.1W, Tolerance=±1%, Author="CERN DEM JLC", Component Type=Standard, CreateDate=2011-05-02, HelpURL=\\cern.ch\dfs\Applications\Altium\Datasheets\R0603_PHYCOMP_RC0603.pdf, LatestRevisionDate=2011-05-02, Manufacturer Part Number=R0603_2K7_1%_0.1W_100PPM, Mounted=Yes, Part Description="General Purpose Thick Film Chip Resistor", Part Number=R0603_2K7_1%_0.1W_100PPM, Pin Count=2, PressFit=No, Sense=No, SMD=Yes, Socket=No, Status=Preferred, TC=±100ppm/°C
R141 R143 R147: library part R0402_1k_1%_0.0625W_100PPM, "Resistor - 1%", Case=0402, Manufacturer=GENERIC, Manufacturer1 ComponentHeight=0.4mm, Manufacturer1 Example="YAGEO PHYCOMP", Manufacturer1 Part Number=232270671002L, Manufacturer Part Number=R0402_1K_1%_0.0625W_100PPM, Power=0.0625W, Tolerance=±1%, Author="CERN DEM JLC", Component Type=Standard, CreateDate=03.12.2007, HelpURL=\\cern.ch\dfs\Applications\Altium\Datasheets\R0402_Phycomp_RC0402.pdf, LatestRevisionDate=17.10.2012, Mounted=Yes, Part Description="General Purpose Thick Film Chip Resistor", Part Number=R0402_1K_1%_0.0625W_100PPM, Pin Count=2, PressFit=No, Sense=No, SMD=Yes, Socket=No, Status="Not Recommended"
R149: library part R0805_0R_JUMPER, "Resistor", Case=0805, Manufacturer=GENERIC, Manufacturer1 ComponentHeight=0.6mm, Manufacturer1 Example="NIC COMPONENT", Manufacturer1 Part Number=NRC10Z0, Author="CERN DEM JLC", Component Type=Standard, CreateDate=03.12.2007, HelpURL=\\cern.ch\dfs\Applications\Altium\Datasheets\R0805_NIC_NRC.pdf, LatestRevisionDate=13.03.2008, Manufacturer Part Number=R0805_0R_JUMPER, Mounted=Yes, Part Description="2A (0.05R Max DC Resistance) Zero Ohm Jumper", Part Number=R0805_0R_JUMPER, Pin Count=2, PressFit=No, Sense=No, SMD=Yes, Socket=No, Status=Preferred
R154 R155 R156 R157: library part "R0805_4M7_1%_0.125W_100PPM_VISHAY_CRCW e3", "Resistor - 1%", Case=0805, Manufacturer=VISHAY, Manufacturer Part Number=CRCW08054M70FKEA, Power=0.125W, Tolerance=±1%, Author="CERN DEM BR", Component Type=Standard, ComponentHeight=0.5mm, CreateDate=27/05/2019, HelpURL="\\cern.ch\dfs\Applications\Altium\Datasheets\R0805_VISHAY_CRCW e3.pdf", LatestRevisionDate=27/05/2019, Mounted=Yes, Part Description="150V, Standard Thick Film Chip Resistor", Part Number="R0805_4M7_1%_0.125W_100PPM_VISHAY_CRCW e3", Pin Count=2, PressFit=No, Sense=No, SMD=Yes, Socket=No, Status=None, TC=±100ppm/°C
R164: library part R0402_10R_1%_0.0625W_200PPM, "Resistor - 1%", Case=0402, Manufacturer=GENERIC, Manufacturer1 ComponentHeight=0.4mm, Manufacturer1 Example="YAGEO PHYCOMP", Manufacturer1 Part Number=232270671009L, Power=0.0625W, Tolerance=±1%, Author="CERN DEM JLC", Component Type=Standard, CreateDate=24.06.2009, HelpURL=\\cern.ch\dfs\Applications\Altium\Datasheets\R0402_Phycomp_RC0402.pdf, LatestRevisionDate=17.10.2012, Manufacturer Part Number=R0402_10R_1%_0.0625W_200PPM, Mounted=Yes, Part Description="General Purpose Thick Film Chip Resistor", Part Number=R0402_10R_1%_0.0625W_200PPM, Pin Count=2, PressFit=No, Sense=No, SMD=Yes, Socket=No, Status="Not Recommended", TC=±200ppm/°C
RN5: library part RN_10K_5K_VISHAY_AORN2-1AT3, "DIL8 Resistor Network 4 Resistors 10k-5k-5k-10k 0.1%", Case=SOIC8, Manufacturer="VISHAY DALE", Manufacturer Part Number=AORN2-1AT3, Power=4x0.1W, Tolerance=0.1%, Author="CERN DEM JLC", Component Type=Standard, ComponentHeight=1.73mm, CreateDate=20.02.2017, HelpURL=\\cern.ch\dfs\Applications\Altium\Datasheets\RN_VISHAY_AORN.pdf, LatestRevisionDate=20.02.2017, Mounted=Yes, Part Description="Dual-In-Line Thin Film Precision Automotive Resistors Network, (4 Isolated) - AORN Series", Part Number=RN_10K_5K_VISHAY_AORN2-1AT3, Pin Count=8, PressFit=No, Sense=No, SMD=Yes, Socket=No, TC=±25ppm/°C
ST1: "Schroff 3HP 4U EUROCARD Panel Kit", Manufacturer=Schroff, Manufacturer Part Number=20818-017, Manufacturer Part Number 2=20848-664
T1 T2 T3 T4 T13: "N-CHANNEL MOSFET WITH DIODE", Case=SOT23-3, Manufacturer=NEXPERIA, Author="CERN DEM JLC", Bonding=No, Component Type=Standard, ComponentHeight=1.1mm, CreateDate=16.03.2010, Device=BSH103, HelpURL=\\cern.ch\dfs\Applications\Altium\Datasheets\BSH103.pdf, LatestRevisionDate=20.06.2017, Manufacturer Part Number=BSH103, Mounted=Yes, PackageDescription="SOT23, 0.95mm Pitch; 3 Pin, 1.30mm W X 2.90mm L X 1.10mm H body, IPC Medium Density", Part Description="30V 850mA N-Channel Enhancement Mode Field-Effect Transistor", Part Number=BSH103, Pin Count=3, PressFit=No, Sense=No, SMD=Yes, Socket=No
TP1 TP2 TP3 TP4 TP5 TP6 TP7 TP8 TP9 TP10 TP11 TP12: library part SMD_PAD_1.27X1.27MM, Author="CERN DEM JLC", Component Type="Standard (No BOM)", ComponentHeight=0mm, CreateDate=12.01.2008, Family="Test Point", HelpURL=Undefined, LatestRevisionDate=12.01.2008, Mounted=No, PackageDescription="1.27mm x 1.27mm PCB Copper Area (SMD Test Point)", Part Description="1.27mm x 1.27mm PCB Copper Area (SMD Test Point)", Part Number=SMD_PAD_1.27X1.27MM, Pin Count=1, Sense=No, SMD=Yes, Socket=No, Status=None
TR1 TR2 TR3 TR4 TR5: library part XFMR_MINI-CIRCUITS_TC2-1TX+, "50 Ohms 3 to 300MHz RF Transformer", Manufacturer=MINI-CIRCUITS, Manufacturer Part Number=TC2-1TX+, Author="CERN DEM MR", Component Type=Standard, ComponentHeight=4.06mm, CreateDate=18.10.2019, HelpURL=\\cern.ch\dfs\Applications\Altium\Datasheets\XFMR_MINI-CIRCUITS_TC2-1TX+.pdf, LatestRevisionDate=18.10.2019, Mounted=Yes, Part Description="50 Ohms 3 to 300MHz RF Transformer", Part Number=XFMR_MINI-CIRCUITS_TC2-1TX+, Pin Count=5, Sense=No, SMD=Yes, Socket=No, Status=None
U1: library part CMP-09139-000213-1, "36VIN, 1.5A BUCK-BOOST UMODULE"
WASHER4 WASHER6 WASHER7: library part Keystone_7687, "SMA_Shoulder Washer", Author=GK, Component Type=Mechanical, ComponentHeight=1.91mm, CreateDate=28.01.2016, HelpURL=\\cern.ch\dfs\Applications\Altium\Datasheets\AAVID-THERMALLOY_7721-7PPSG.pdf, LatestRevisionDate=28.01.2016, Manufacturer="Custom 3D printed", Manufacturer Part Number="Custom 3D printed", Mounted=Yes, PackageDescription="Polyphenylene Sulfide PPS Shoulder Washer", Part Description="Polyphenylene Sulfide PPS Shoulder Washer", Part Number="Custom 3D printed", Pin Count=0, PressFit=No, Sense=No, SMD=No, Socket=No, Status=None
NT1 NT2: Author="CERN DEM JLC", Component Type="Net Tie", ComponentHeight=0mm, CreateDate=22.03.2011, Family="Net Tie", HelpURL=Undefined, LatestRevisionDate=22.03.2011, Mounted=No, PackageDescription="2 Plated Through Hole For Coaxial Cable Link: Hole Dia.=1.4mm Pad Dia.=2.5mm", Part Description="Net Tie (2 Nets)", Part Number="Net Tie", Pin Count=2, Sense=No, SMD=No, Socket=No, Status=None

## Via types
v1: diameter 0.5, hole 0.2, Top to Bot, tented both sides, 654 vias
v2: diameter 0.6, hole 0.3, Top to Bot, 478 vias
v3: diameter 0.5, hole 0.2, Top to Bot, 196 vias
v4: diameter 0.45, hole 0.2, Top to Bot, 34 vias

## Nets (pads, with @x,y where several pads share a name; then routed paths per layer and width w, separated by ;. In a path a pad name is that pad's centre, name@x,y a point inside that pad or via, vN(x,y) a via of type N, cw(c..) or ccw(c..) an arc to the next point about the centre after c; other vN are vias at no path point)
2/3Vs: IC17.6 R84.2 R87.2 R90.2 R94.2 R97.2 R102.2 R105.2 R108.2 R111.2 R115.2 R133.2 | length 37.6
  Top w0.3: v2(20.749,58.147) R84.2@21.642,58.147 ; v2(20.749,59.866) R87.2@21.642,59.866 ; v2(20.749,61.586) R90.2@21.642,61.586 ; v2(20.749,63.305) R94.2@21.642,63.305 ; v2(20.749,65.025) R97.2@21.642,65.025 ; v2(20.749,66.744) R102.2@21.642,66.744 ; v2(20.749,68.464) R105.2@21.642,68.464 ; v2(20.749,70.183) R108.2@21.642,70.183 ; v2(20.749,71.903) R111.2@21.642,71.903 ; v2(20.749,73.622) R115.2@21.642,73.622 ; v2(20.749,75.342) R133.2@21.642,75.342 ; v2@29.482,76.586 29.477,76.581 29.477,76.457 29.912,76.022 IC17.6@29.912,75.34
  L3 w0.3: v2(20.749,58.147) v2(20.749,59.866) v2(20.749,61.586) v2(20.749,63.305) v2(20.749,65.025) v2(20.749,66.744) v2(20.749,68.464) v2(20.749,70.183) v2(20.749,71.903) v2(20.749,73.622) v2(20.749,75.342) 21.995,76.588 v2(29.412,76.588)
BP_IO.GA0: IC32.4 R57.1 | length 2.4
  Top w0.152: IC32.4@177.732,7.405 178.646,7.405 178.772,7.28 178.772,6.642 178.914,6.5 R57.1@179.4,6.5
BP_IO.GA1: IC32.1 R52.1 | length 3.3
  Top w0.15: IC32.1@177.732,5.445 177.758,5.471 178.595,5.471 179.031,5.907 180.182,5.907 180.335,6.06 R52.1@180.335,6.5
BP_IO.GA2: IC32.11 R53.1 | length 1.4
  Top w0.152: R53.1@170.501,7.395 170.511,7.405 IC32.11@171.932,7.405
BP_IO.GA3: IC32.8 R55.1 | length 1.4
  Top w0.152: R55.1@170.5,9.355 R55.1@170.511,9.366 IC32.8@171.932,9.366 ; IC32.8@171.932,9.345 IC32.8@171.935,9.342
BP_IO.LVDS_N0: J6.E3 R34.2 | length 65
  Top w0.172: R34.2@190.465,54.706 190.465,54.726 190.75,55.012 191.013,55.012 193.702,52.322 193.702,46.393 205,35.095 205,29.479 216.806,17.673 216.867,17.612 217.413,17.066 cw(c217.291,16.944) 217.413,16.822 217.37,16.779 ccw(c217.479,16.67) 217.37,16.56 217.697,16.233 ccw(c217.807,16.342) 217.916,16.233 217.959,16.276 cw(c218.081,16.154) 218.203,16.276 218.393,16.086 218.454,16.025 218.95,15.529 218.95,10.323 218.364,9.737 213.409,9.737 212.889,9.217 212.889,8.95 212.439,8.5 J6.E3@212.339,8.5
BP_IO.LVDS_N1: J6.B3 R36.2 | length 66.5
  Top w0.172: R36.2@190.465,50.53 R36.2@190.465,50.55 190.465,50.57 190.749,50.854 191.166,50.854 191.33,50.69 v1(191.419,50.69)
  Bot w0.172: v1(191.419,50.69) 191.508,50.69 191.671,50.854 191.927,50.854 192.028,50.753 192.028,49.454 191.022,48.448 191.022,17.555 192.138,16.439 192.138,15.589 198.29,9.437 216.926,9.437 217.089,9.274 217.089,9 216.589,8.5 J6.B3@216.539,8.5
BP_IO.LVDS_N2: J6.C4 R38.2 | length 55.2
  Top w0.172: R38.2@190.445,46.6 190.445,46.62 190.738,46.913 190.994,46.913 202.151,35.755 202.556,35.755 202.703,35.609 202.703,35.353 202.539,35.189 v1(202.539,35.1)
  Bot w0.172: v1(202.539,35.1) 202.539,35.011 202.703,34.848 202.703,34.468 205.516,31.654 210.844,31.654 214.101,28.397 214.101,20.024 218.475,15.65 218.925,15.2 218.925,11.975 218.624,11.674 216.158,11.674 215.789,11.305 215.789,10.95 215.339,10.5 J6.C4@215.239,10.5
BP_IO.LVDS_N3: J6.L4 R60.2 | length 39.6
  Top w0.172: R60.2@190.47,42.77 R60.2@190.738,43.038 ; 190.826,43.102 191.019,43.102 197.971,36.149 197.971,14.592 201.179,11.384 203.022,11.384 203.189,11.217 203.189,10.95 202.739,10.5 J6.L4@202.639,10.5
BP_IO.LVDS_N4: J6.I4 R62.2 | length 42
  Top w0.172: R62.2@190.47,38.895 190.739,39.164 191.868,39.164 192.545,38.486 192.744,38.288 194.228,36.804 194.228,25.703 194.064,25.539 v1(194.064,25.451)
  Bot w0.172: v1(194.064,25.451) 194.064,25.362 194.228,25.198 194.228,15.824 195.24,14.812 195.438,14.613 198.677,11.375 207.264,11.375 207.389,11.25 207.389,11.042 206.847,10.5 J6.I4@206.839,10.5
BP_IO.LVDS_N5: J6.K5 R44.2 | length 36.2
  Top w0.172: R44.2@190.47,34.92 190.738,35.188 191.687,35.188 191.711,35.164 193.027,35.164 193.191,35 v1(193.28,35) ; v1(199.731,34.657) 199.746,34.671 199.949,34.671 200.651,33.969 200.651,13.949 201.286,13.314 204.366,13.314 204.488,13.192 204.488,13.049 J6.K5@203.939,12.5
  Bot w0.172: v1(193.28,35) 193.369,35 193.532,35.164 196.508,35.164 196.532,35.188 199.432,35.188 199.669,34.951 199.669,34.719 v1(199.731,34.657)
BP_IO.LVDS_N6: J6.H5 R46.2 | length 36
  Top w0.172: R46.2@190.47,31.625 190.47,31.645 190.738,31.913 191.019,31.913 192.981,29.951 192.981,26.139 191.904,25.062 191.904,17.509 192.749,16.664 195.673,16.664 195.836,16.5 v3(195.925,16.5)
  Bot w0.172: v3(195.925,16.5) 196.014,16.5 196.177,16.664 198.142,16.664 201.322,13.484 201.434,13.372 208.517,13.372 208.689,13.2 208.689,12.934 208.255,12.5 J6.H5@208.139,12.5
BP_IO.LVDS_N7: J6.F6 R67.2 | length 33.4
  Top w0.172: R67.2@190.47,27.2 190.47,27.22 190.75,27.5 191.326,27.5 191.34,27.486 191.951,27.486 192.115,27.322 v1(192.203,27.322)
  Bot w0.172: v1(192.203,27.322) 192.292,27.322 192.456,27.486 200.934,27.486 200.948,27.5 209.35,27.5 211.589,25.261 211.589,15.225 211.589,14.958 211.131,14.5 J6.F6@211.039,14.5
BP_IO.LVDS_P0: J6.D3 R31.2 | length 65
  Top w0.172: R31.2@190.465,55.616 190.465,55.596 190.75,55.311 191.137,55.311 194.002,52.446 194.002,46.517 205.299,35.219 205.299,29.603 219.249,15.653 219.249,10.199 218.488,9.437 213.533,9.437 213.188,9.093 213.188,8.95 213.639,8.5 J6.D3@213.739,8.5
BP_IO.LVDS_P1: J6.A3 R35.2 | length 67
  Top w0.172: R35.2@190.465,51.456 190.465,51.436 190.748,51.153 191.166,51.153 191.33,51.317 v1(191.419,51.317) ; R35.2@190.465,51.461 R35.2@190.467,51.459
  Bot w0.172: v1(191.419,51.317) 191.508,51.317 191.671,51.153 192.051,51.153 192.328,50.877 192.328,49.33 191.321,48.324 191.321,17.679 192.437,16.563 192.437,15.713 198.414,9.737 217.05,9.737 217.388,9.398 217.388,9 217.888,8.5 J6.A3@217.939,8.5
BP_IO.LVDS_P2: J6.B4 R37.2 | length 55.7
  Top w0.172: R37.2@190.445,47.525 190.445,47.505 190.738,47.212 191.118,47.212 202.275,36.054 202.68,36.054 203.002,35.733 203.002,35.353 203.166,35.189 v1(203.166,35.1)
  Bot w0.172: v1(203.166,35.1) 203.166,35.011 203.002,34.848 203.002,34.592 205.64,31.953 210.968,31.953 214.4,28.521 214.4,20.148 218.488,16.06 219.224,15.324 219.224,11.851 218.748,11.375 216.282,11.375 216.088,11.181 216.088,10.95 216.538,10.5 J6.B4@216.639,10.5
BP_IO.LVDS_P3: J6.K4 R59.2 | length 40.1
  Top w0.172: R59.2@190.47,43.605 190.674,43.401 191.143,43.401 198.27,36.273 198.27,14.716 201.303,11.684 203.146,11.684 203.488,11.341 203.488,11.093 203.488,10.95 203.939,10.5 J6.K4@204.039,10.5
BP_IO.LVDS_P4: J6.H4 R61.2 | length 42.5
  Top w0.172: R61.2@190.465,39.73 190.732,39.463 191.992,39.463 194.527,36.928 194.527,25.703 194.691,25.539 v1(194.691,25.451)
  Bot w0.172: v1(194.691,25.451) 194.691,25.362 194.527,25.198 194.527,15.948 198.801,11.674 207.388,11.674 207.688,11.374 207.688,11.042 208.231,10.5 J6.H4@208.239,10.5
BP_IO.LVDS_P5: J6.J5 R63.2 | length 36.7
  Top w0.172: R63.2@190.47,35.755 190.738,35.487 191.811,35.487 191.835,35.463 193.027,35.463 193.191,35.627 v1(193.28,35.627) ; v1(200.175,35.1) 200.16,35.086 200.16,34.883 200.95,34.093 200.95,14.073 201.41,13.613 204.49,13.613 204.787,13.316 204.787,13.052 J6.J5@205.339,12.5
  Bot w0.172: v1(193.28,35.627) 193.369,35.627 193.532,35.463 196.384,35.463 196.408,35.487 199.556,35.487 199.88,35.163 200.112,35.163 v1(200.175,35.1)
BP_IO.LVDS_P6: J6.G5 R45.2 | length 36.5
  Top w0.172: R45.2@190.47,32.5 190.47,32.48 190.738,32.212 191.143,32.212 193.28,30.075 193.28,26.015 192.203,24.938 192.203,17.633 192.873,16.963 195.673,16.963 195.836,17.127 v3(195.925,17.127)
  Bot w0.172: v3(195.925,17.127) 196.014,17.127 196.177,16.963 198.266,16.963 201.336,13.894 201.558,13.672 208.641,13.672 208.988,13.324 208.988,12.934 209.422,12.5 J6.G5@209.539,12.5
BP_IO.LVDS_P7: J6.E6 R66.2 | length 33.9
  Top w0.172: R66.2@190.47,28.1 190.47,28.08 190.75,27.8 191.45,27.8 191.464,27.785 191.951,27.785 192.115,27.949 v1(192.203,27.949)
  Bot w0.172: v1(192.203,27.949) 192.292,27.949 192.456,27.785 200.81,27.785 200.824,27.8 209.474,27.8 211.888,25.385 211.888,15.101 211.888,14.958 212.346,14.5 J6.E6@212.439,14.5
BP_SCL: D3.1 IC12.8 IC12.11 J6.B2 | length 49.2
  Top w0.152: IC12.11@181.799,7.405 182.955,7.405 ; IC12.8@181.799,9.355 182.737,9.355 182.955,9.137 182.955,7.405 ; 190.166,7.34 190.17,7.336 195.4,7.336 198.429,4.307 200.4,4.307 201.207,3.5 218.307,3.5 218.808,4.001 218.808,4.938 218.181,5.565 217.573,5.565 J6.B2@216.639,6.5 ; D3.1@190.167,8.109 190.167,7.342 189.239,6.414 189.239,5.254 188.685,4.699 186.443,4.699 183.737,7.405 182.955,7.405
BP_SDA: D3.3 IC12.1 IC12.4 J6.C2 | length 34.6
  Top w0.152: IC12.1@187.599,5.455 188.539,5.455 188.755,5.672 188.755,7.405 188.738,7.405 ; IC12.4@187.599,7.405 188.738,7.405 ; J6.C2@215.239,6.5 214.982,6.5 214.716,6.234 214.709,6.234 213.852,5.377 198.354,5.377 195.922,7.809 191.599,7.809 191.475,7.933 D3.3@191.475,8.117 191.475,9.12 191.164,9.432 190.284,9.432 189.584,8.732 189.584,8.252 188.738,7.405
CHASSIS: C97.1 R130.2 R157.2 ST1.0 | length 9.9
  Top w0.4: ST1.0@3.556,5.512 6.838,5.512 7.836,4.514 C97.1@8.9,4.514 ; R130.2@8.875,5.95 8.9,5.925 C97.1@8.9,4.514 ; C97.1@8.925,4.314 8.9,4.339 C97.1@8.9,4.514 ; 37.95,1.75 38,1.8
  Bot w0.4: R157.2@37.875,3.85 37.875,1.625 v3@38,1.5
  other v3: 37.889,1.488
EEM_OUT0_N: C11.2 IC14.14 R23.1 | length 2.8
  Top w0.172: C11.2@29.753,25.239 29.977,25.462 ccw(c29.977,25.524) 30.021,25.481 ccw(c29.82,25.681) 30.104,25.681 30.104,27.479 cw(c30.388,27.763) 29.986,27.763 IC14.14@29.986,27.906
EEM_OUT0_P: C18.2 IC14.15 R22.1 | length 2.8
  Top w0.172: IC14.15@30.486,27.906 30.486,27.674 cw(c30.298,27.674) 30.431,27.541 ccw(c30.498,27.474) 30.403,27.474 30.403,25.681 ccw(c30.686,25.681) 30.486,25.481 ccw(c30.529,25.524) 30.529,25.462 C18.2@30.753,25.239
EEM_OUT0C_N: C11.1 TR1.1 | length 18.9
  Top w0.172: TR1.1@18.43,16.45 18.694,16.186 19.54,16.186 20.396,15.33 24.409,15.33 ccw(c24.409,17.87) 26.205,16.074 29.358,19.227 ccw(c27.562,21.023) 30.102,21.023 30.102,21.534 30.102,22.393 ccw(c29.93,22.393) 29.93,22.565 29.88,22.565 cw(c29.88,22.72) 29.726,22.72 29.726,23.183 cw(c29.88,23.183) 29.88,23.338 29.93,23.338 ccw(c29.93,23.51) 30.102,23.51 30.102,23.867 30.102,23.978 ccw(c29.753,23.978) C11.1@29.753,24.327
EEM_OUT0C_P: C18.1 TR1.3 | length 18.9
  Top w0.172: TR1.3@18.43,13.91 18.694,14.174 19.523,14.174 20.38,15.03 24.413,15.03 ccw(c24.413,17.862) 26.415,15.86 29.572,19.017 ccw(c27.57,21.019) 30.402,21.019 30.402,23.975 cw(c30.753,23.975) C18.1@30.753,24.327
EEM_OUT1_N: C20.2 IC14.11 R25.1 | length 4.3
  Top w0.172: C20.2@25.219,28.006 25.428,27.797 cw(c25.393,27.762) 25.442,27.762 ccw(c25.491,27.762) 25.457,27.727 25.493,27.691 ccw(c25.615,27.813) 25.615,27.641 26.448,27.641 ccw(c26.448,28.018) 26.714,27.751 27.733,28.77 cw(c28.303,28.2) 28.303,29.006 28.305,29.006 ccw(c28.305,29.177) 28.426,29.056 cw(c28.547,28.935) 28.547,29.106 IC14.11@28.786,29.106
EEM_OUT1_P: C22.2 IC14.12 R68.1 | length 4.3
  Top w0.172: C22.2@25.219,26.976 25.428,27.185 ccw(c25.393,27.22) 25.442,27.22 cw(c25.491,27.22) 25.457,27.255 25.493,27.291 cw(c25.615,27.169) 25.615,27.341 26.451,27.341 ccw(c26.451,28.011) 26.924,27.537 27.943,28.556 cw(c28.305,28.194) 28.305,28.706 cw(c28.305,28.535) 28.426,28.656 ccw(c28.547,28.777) 28.547,28.606 IC14.12@28.786,28.606
EEM_OUT1C_N: C20.1 TR2.1 | length 17.4
  Top w0.172: TR2.1@18.43,25.897 18.694,25.633 19.54,25.633 20.395,24.777 20.468,24.777 cw(c20.468,23.995) 21.25,23.995 21.25,20.767 ccw(c22,20.767) 22,20.017 ccw(c22,20.718) 22.701,20.718 22.701,26.471 cw(c23.859,26.471) 23.859,27.629 24.003,27.629 ccw(c24.003,27.944) C20.1@24.319,27.944
EEM_OUT1C_P: C22.1 TR2.3 | length 17.4
  Top w0.172: TR2.3@18.43,23.357 18.694,23.62 19.523,23.62 20.38,24.477 ; 20.38,24.478 20.468,24.478 cw(c20.468,23.995) 20.951,23.995 20.951,20.767 ccw(c22,20.767) 22,19.718 ccw(c22,20.718) 23,20.718 23,26.471 cw(c23.859,26.471) 23.859,27.329 24.003,27.329 cw(c24.003,27.014) C22.1@24.319,27.014
EEM_OUT2_N: C25.2 IC14.9 R69.1 | length 4.3
  Top w0.172: C25.2@25.219,31.736 25.428,31.527 cw(c25.393,31.492) 25.442,31.492 ccw(c25.491,31.492) 25.457,31.457 25.493,31.421 ccw(c25.615,31.543) 25.615,31.371 26.451,31.371 cw(c26.451,30.701) 26.924,31.175 27.943,30.156 ccw(c28.305,30.518) 28.305,30.006 ccw(c28.305,30.177) 28.426,30.056 cw(c28.547,29.935) 28.547,30.106 IC14.9@28.786,30.106
EEM_OUT2_P: C29.2 IC14.10 R27.1 | length 4.3
  Top w0.172: C29.2@25.219,30.706 25.428,30.915 ccw(c25.393,30.95) 25.442,30.95 cw(c25.491,30.95) 25.457,30.985 25.493,31.021 cw(c25.615,30.899) 25.615,31.071 26.448,31.071 cw(c26.448,30.694) 26.714,30.961 27.733,29.942 ccw(c28.303,30.512) 28.303,29.706 28.305,29.706 cw(c28.305,29.535) 28.426,29.656 ccw(c28.547,29.777) 28.547,29.606 IC14.10@28.786,29.606
EEM_OUT2C_N: C25.1 TR3.1 | length 17.4
  Top w0.172: TR3.1@18.43,35.343 18.694,35.08 19.523,35.08 20.38,34.223 ; 20.38,34.222 20.468,34.222 ccw(c20.468,34.705) 20.951,34.705 20.951,37.933 cw(c22,37.933) 22,38.982 cw(c22,37.982) 23,37.982 23,32.229 ccw(c23.859,32.229) 23.859,31.371 24.003,31.371 ccw(c24.003,31.686) C25.1@24.319,31.686
EEM_OUT2C_P: C29.1 TR3.3 | length 17.4
  Top w0.172: TR3.3@18.43,32.803 18.694,33.067 19.54,33.067 20.395,33.923 20.468,33.923 ccw(c20.468,34.705) 21.25,34.705 21.25,37.933 cw(c22,37.933) 22,38.683 cw(c22,37.982) 22.701,37.982 22.701,32.229 ccw(c23.859,32.229) 23.859,31.071 24.003,31.071 cw(c24.003,30.756) C29.1@24.319,30.756
EEM_OUT3_N: C34.2 IC14.6 R70.1 | length 2.8